# Altium PCB PCB文档.PcbDoc
Units mil, origin at the board's own origin, x right, y up, seen from the top; angles counter-clockwise.
Board outline 3937.01 x 3937.01 mil, 2 copper layers (Top Layer, Bottom Layer); 16 components, 25 nets, 105 pads, 0 vias.
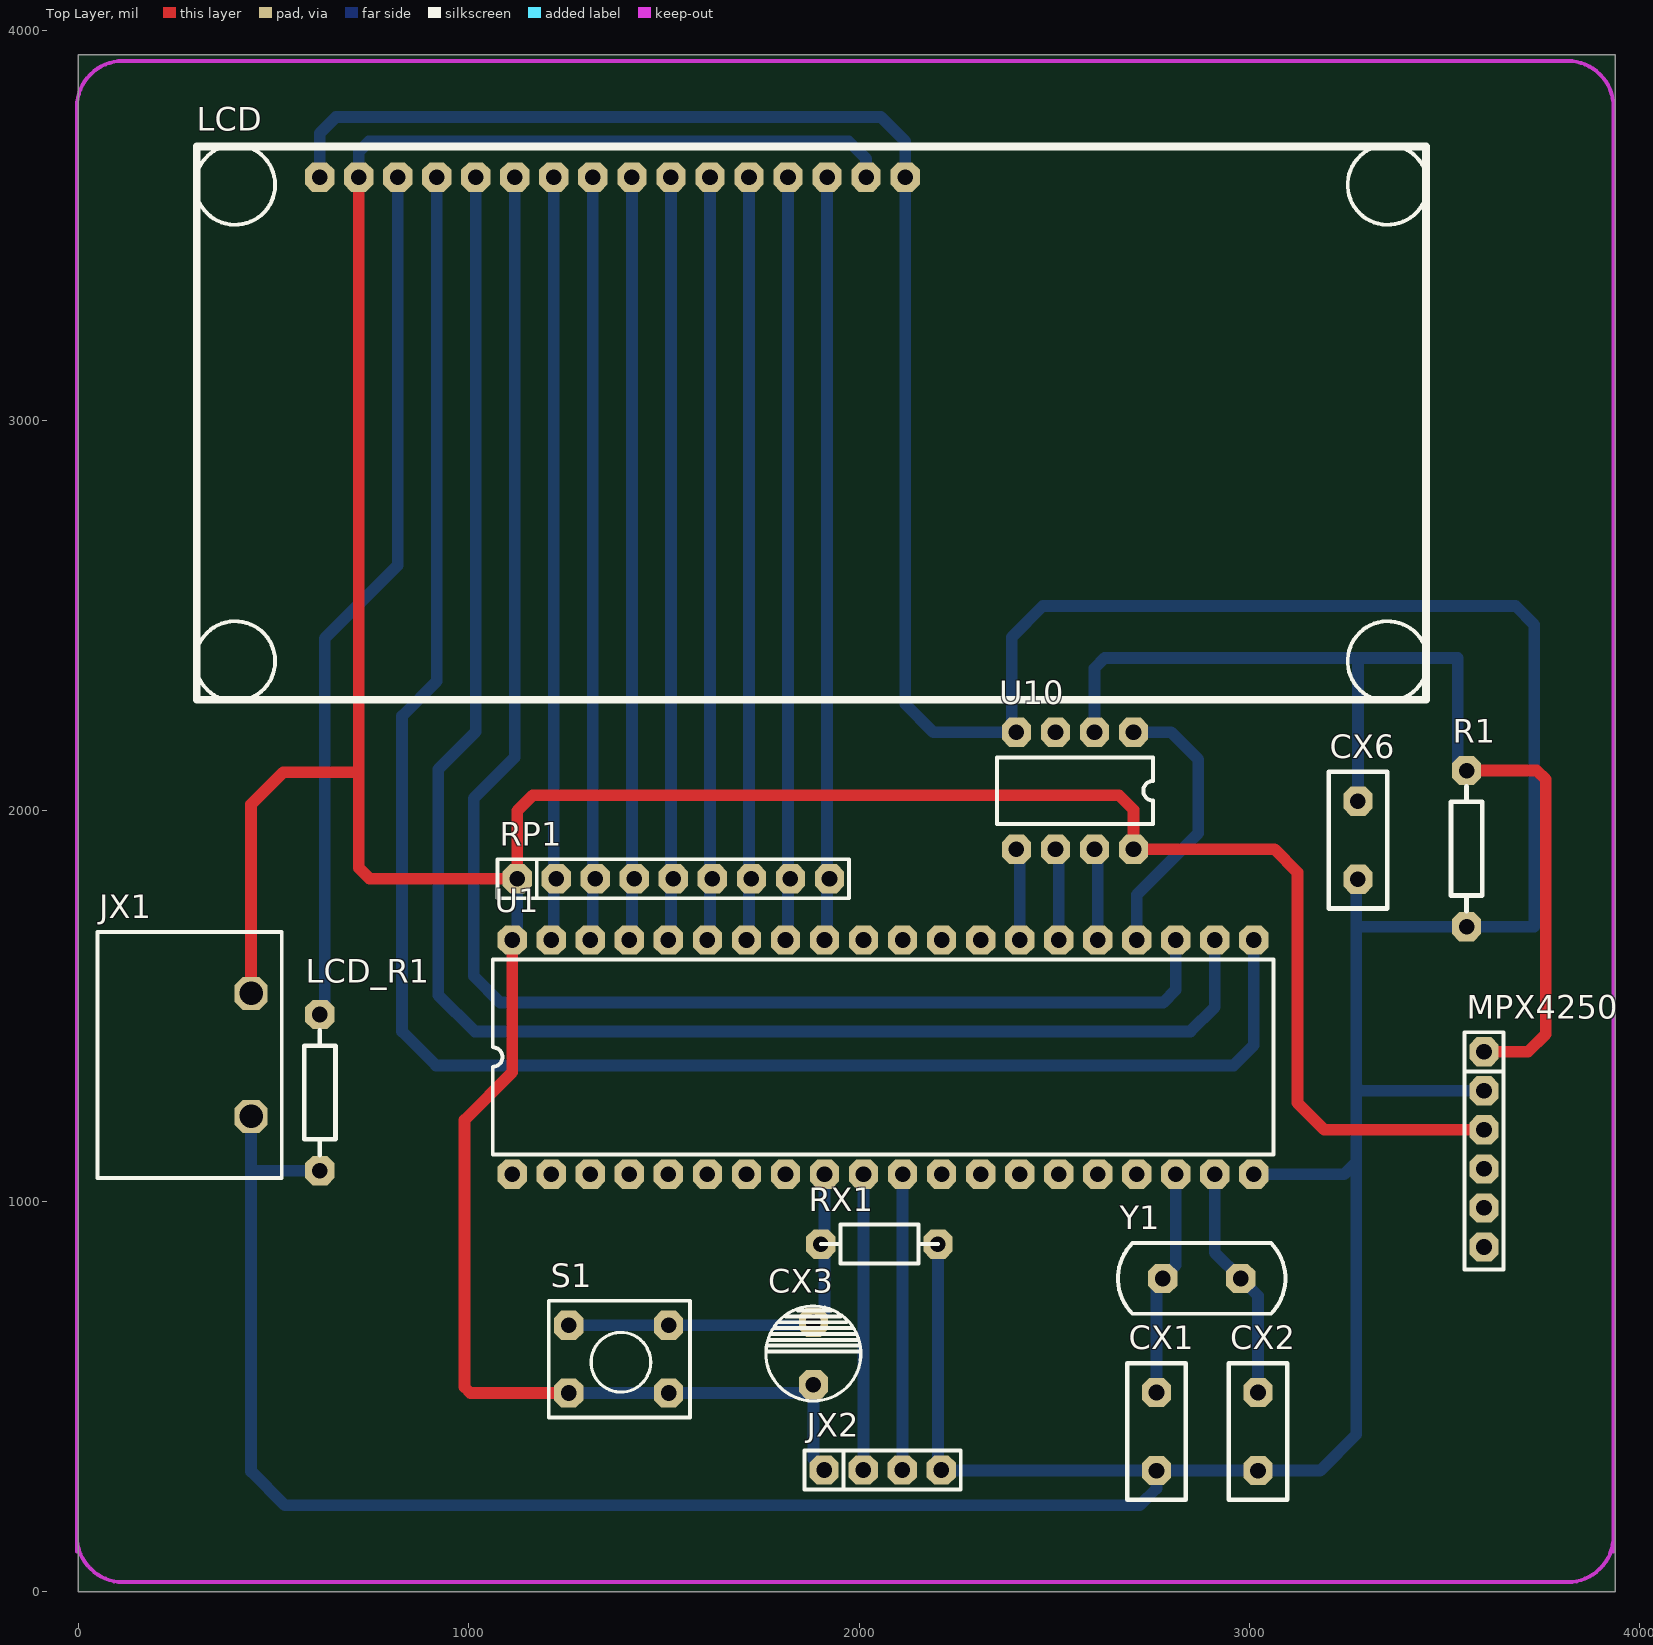
[diagram p0: Top Layer view]
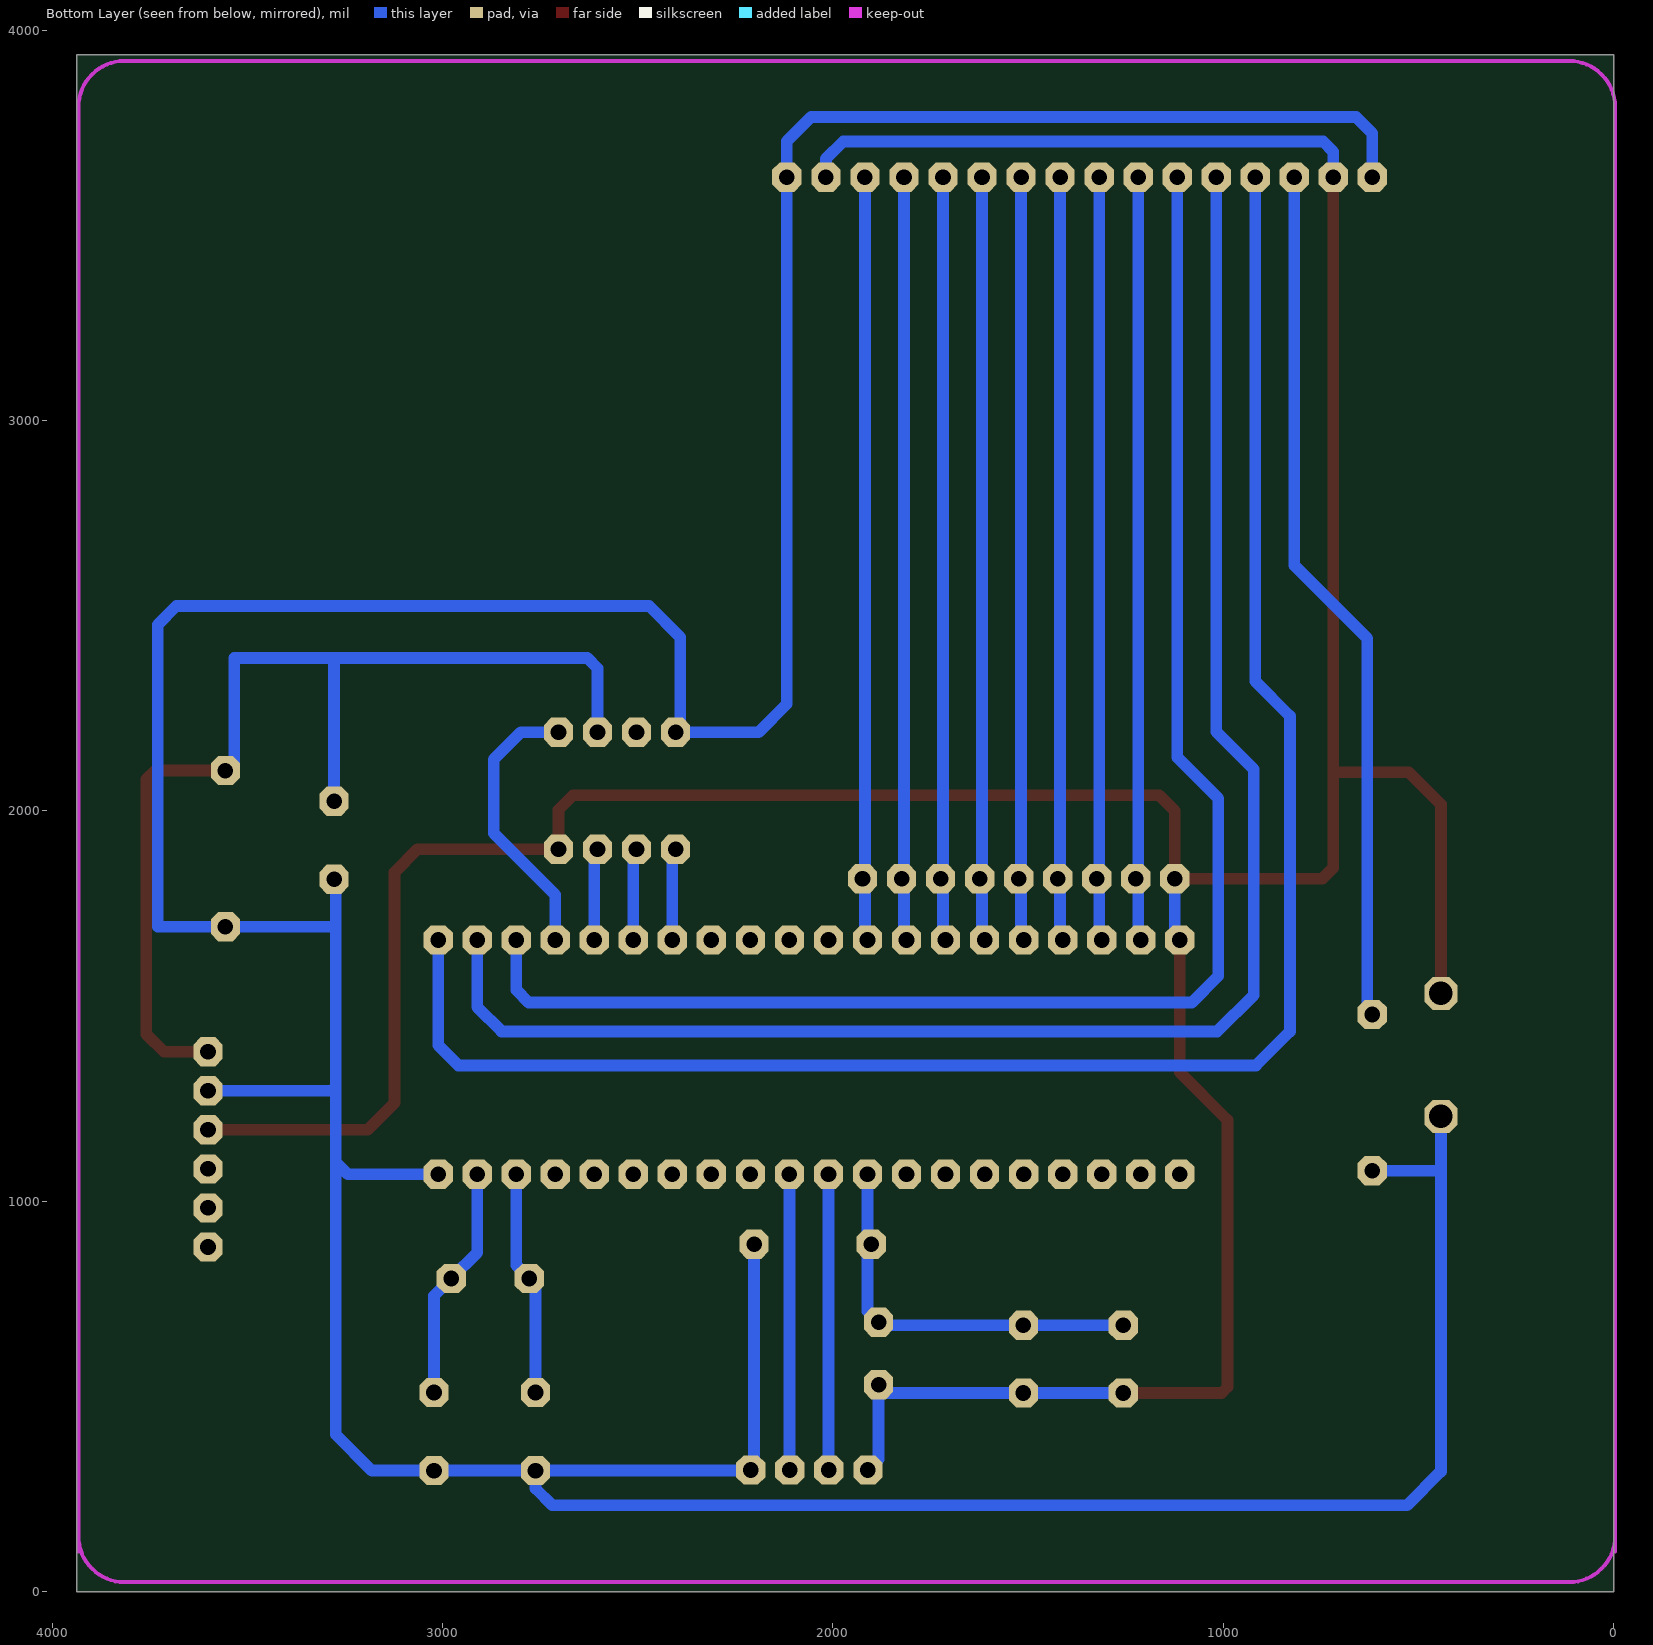
[diagram p1: Bottom Layer view, seen from below]

## Layer stack, top to bottom
Top Solder: solder mask 0.4, Solder Resist, Dk 3.5
Top Layer: signal copper 1.4
Dielectric1: dielectric 12.6, FR-4, Dk 4.8
Bottom Layer: signal copper 1.4
Bottom Solder: solder mask 0.4, Solder Resist, Dk 3.5

## Board outline
0,0 3937.01,0 3937.01,3937.01 0,3937.01

## Design rules (kind name [scope] priority, off if disabled: settings)
Clearance [All] p1: gap=10 ignorepadtopadclearanceinfootprint=FALSE except(0: Arc-Hole Track-Hole SMDPad-Hole THPad-Hole Via-Hole Fill-Hole Poly-Hole Region-Hole Text-Hole)
ComponentClearance [All] p1 off: gap=10 collisioncheckmode=3 verticalgap=10 showdistances=FALSE
FabricationTestPointUsage TestPointUsage [All] p1: valid=0 allowmultiple=FALSE
FabricationTestpoint Testpoint [All] p1: side=3 testpointundercomponent=TRUE minsize=40 maxsize=100 preferedsize=60 minholesize=0 maxholesize=40 preferedholesize=32 testpointgrid=1 allowsidetop=TRUE allowsidebottom=TRUE usegrid=TRUE gridtolerance=0.01
Height [All] p1 off: minheight=0 maxheight=1000 prefheight=500
MinimumSolderMaskSliver [All] p1 off: minsoldermaskwidth=10
PlaneConnect [All] p1: planeconnectstyle=Direct reliefexpansion=20 reliefentries=4 reliefconductorwidth=10 reliefairgap=10
PolygonConnect [All] p1: connectstyle=Direct reliefconductorwidth=10 reliefentries=4 polygonreliefangle="90 Angle" airgapwidth=10
RoutingVias [All] p1: holewidth=11.81 width=27.56 viastyle="Through Hole" minholewidth=11.81 minwidth=27.56 maxholewidth=11.81 maxwidth=27.56
SilkToSilkClearance [All] p1 off: silktosilkclearance=10
SilkToSolderMaskClearance SilkscreenOverComponentPads [IsPad] p1 off: minsilkscreentomaskgap=10 clearancetoexposedcopper=TRUE
SolderMaskExpansion [All] p1: expansion=4 istentingtop=FALSE
Width [All] p1: maxlimit=60 minlimit=30 preferedwidth=30
22 further rules are at their usual default settings.

## Components (designator, comment, footprint, x,y, rotation, side; value= is the part's Value field where it differs from the comment)
CX1 "22PF" 电容22 2742,390 r90 top
CX2 "22PF" 电容22 3002,390 r90 top
CX3 "10UF" 电容10 1882,690 r270 top
CX6 "22PF" 电容22 3258,1905 r90 top
JX1 "电源" 端子 280,1360 r90 top
JX2 "程序下载口" ASIP4 1922,310 r0 top
LCD "LCD1602" ALCD1602 618,3545 r0 top
LCD_R1 "3.3K" 电阻 640,1080 r90 top
MPX4250 "SIP6" ASIP6 3598,1025 r270 top
R1 "61K" 电阻 3578,1705 r90 top
RP1 "排阻" ASIP9 1132,1823 r0 top
RX1 "1K" 电阻0.3 2002,890 r180 top
S1 "按键" 按键 1382,590 r0 top
U1 "STC89C52" ADIP40 1162,1110 r90 top
U10 "ADC0832" ADIP8 2720,2220 r270 top
Y1 "晶振" 晶振 2962,810 r180 top

## Footprints (in the part's own frame and the unit in brackets; to place one, negate y for a bottom-side part, rotate by r counter-clockwise, add the part's x,y. Pads: shape width x height; smd on the part's side, far side on the other; paste and mask are expansions set on the pad)
ADIP8 [mil]
  oct 75x75 hole 40: 1(18.43,-16.85) 2(18.43,-116.85) 3(18.43,-216.85) 4(18.43,-316.85) 5(318.43,-316.85) 6(318.43,-216.85) 7(318.43,-116.85) 8(318.43,-16.85)
  silkscreen extent 83,-367 253,33
ADIP40 [mil]
  oct 75x75 hole 40: 1(-40.55,50.55) 2(-40.55,-49.45) 3(-40.55,-149.45) 4(-40.55,-249.45) 5(-40.55,-349.45) 6(-40.55,-449.45) 7(-40.55,-549.45) 8(-40.55,-649.45) 9(-40.55,-749.45) 10(-40.55,-849.45) 11(-40.55,-949.45) 12(-40.55,-1049.45) 13(-40.55,-1149.45) 14(-40.55,-1249.45) 15(-40.55,-1349.45) 16(-40.55,-1449.45) 17(-40.55,-1549.45) 18(-40.55,-1649.45) 19(-40.55,-1749.45) 20(-40.55,-1849.45) 21(559.45,-1849.45) 22(559.45,-1749.45) 23(559.45,-1649.45) 24(559.45,-1549.45) 25(559.45,-1449.45) 26(559.45,-1349.45) 27(559.45,-1249.45) 28(559.45,-1149.45) 29(559.45,-1049.45) 30(559.45,-949.45) 31(559.45,-849.45) 32(559.45,-749.45) 33(559.45,-649.45) 34(559.45,-549.45) 35(559.45,-449.45) 36(559.45,-349.45) 37(559.45,-249.45) 38(559.45,-149.45) 39(559.45,-49.45) 40(559.45,50.55)
  silkscreen extent 9,-1899 509,101
ALCD1602 [mil]
  oct 75x75 hole 40: 1(0,78.74) 2(100,78.74) 3(200,78.74) 4(300,78.74) 5(400,78.74) 6(500,78.74) 7(600,78.74) 8(700,78.74) 9(800,78.74) 10(900,78.74) 11(1000,78.74) 12(1100,78.74) 13(1200,78.74) 14(1300,78.74) 15(1400,78.74) 16(1500,78.74)
  silkscreen extent -319,-1264 2839,161
ASIP4 [mil]
  oct 75x75 hole 40: 1(-11.57,1.57) 2(88.43,1.57) 3(188.43,1.57) 4(288.43,1.57)
  silkscreen extent -62,-48 338,52
ASIP6 [mm]
  oct 1.905x1.905 hole 1.016: 1(-9.09,0.08) 2(-6.55,0.08) 3(-4.01,0.08) 4(-1.47,0.08) 5(1.07,0.08) 6(3.61,0.08)
  silkscreen extent -10.36,-1.19 5.08,1.35
ASIP9 [mm]
  oct 1.905x1.905 hole 1.016: 1(-0.2,0.08) 2(2.34,0.08) 3(4.88,0.08) 4(7.42,0.08) 5(9.96,0.08) 6(12.5,0.08) 7(15.04,0.08) 8(17.58,0.08) 9(20.12,0.08)
  silkscreen extent -1.47,-1.19 21.39,1.35
按键 [mil]
  oct 75x75 hole 40: 1(-126,92) 1(129.9,92) 2(-126,-81.23) 2(129.9,-81.23)
  silkscreen extent -177,-144 185,155
晶振 [mil]
  oct 75x75 hole 40: 1(-15.69,7.8) 2(184.31,7.8)
  silkscreen extent -130,-83 299,98
电容10 [mil]
  oct 75x75 hole 40: 1(160,1) 2(0,1)
  silkscreen extent -42,-121 202,123
电容22 [mil]
  oct 75x75 hole 40: 1(-80,-20) 2(120,-20)
  silkscreen extent -155,-95 195,55
电阻 [mil]
  oct 75x75 hole 40: 1(-1.57,21.57) 2(398.43,21.57)
  silkscreen extent 38,-18 358,62
电阻0.3 [mil]
  oct 75x75 hole 40: 1(-200,0) 2(100,0)
  silkscreen extent -200,-50 100,50
端子 [mil]
  oct 85x85 hole 60: 1(-142.52,-162.2) 2(172.44,-162.2)
  silkscreen extent -300,-241 330,231

## Part data
CX1 CX2 CX6: library part 电容22PF
CX3: library part 电容10UF
JX1: library part 端子
LCD_R1 R1 RX1: library part 电阻1K
U1: library part 单片机

## Nets (pads, with @x,y where several pads share a name; then routed paths per layer and width w, separated by ;. In a path a pad name is that pad's centre, name@x,y a point inside that pad or via, vN(x,y) a via of type N, cw(c..) or ccw(c..) an arc to the next point about the centre after c; other vN are vias at no path point)
CS: U1.24 U10.1 | length 722.5
  Bottom Layer w30: U10.1 2799.43,2201.57 2869,2132 2869,1943.1 2711.45,1785.55 U1.24
DB0: LCD.7 RP1.2 U1.39 | length 1947.7
  Bottom Layer w30: U1.39@1218,1676 LCD.7
DB1: LCD.8 RP1.3 U1.38 | length 1947.7
  Bottom Layer w30: U1.38@1318,1676 LCD.8
DB2: LCD.9 RP1.4 U1.37 | length 1947.7
  Bottom Layer w30: U1.37@1418,1676 LCD.9
DB3: LCD.10 RP1.5 U1.36 | length 1947.7
  Bottom Layer w30: U1.36@1518,1676 LCD.10
DB4: LCD.11 RP1.6 U1.35 | length 1947.7
  Bottom Layer w30: U1.35@1618,1676 LCD.11
DB5: LCD.12 RP1.7 U1.34 | length 1947.7
  Bottom Layer w30: U1.34@1718,1676 LCD.12
DB6: LCD.13 RP1.8 U1.33 | length 1947.7
  Bottom Layer w30: U1.33@1818,1676 LCD.13
DB7: LCD.14 RP1.9 U1.32 | length 1947.7
  Bottom Layer w30: U1.32@1918,1676 LCD.14
DI: U1.26 U10.6 | length 223.8
  Bottom Layer w30: U1.26 U10.6@2511.45,1893.28
DO: U1.27 U10.5 | length 223.8
  Bottom Layer w30: U1.27 U10.5@2411.45,1893.28
E: LCD.6 U1.23 | length 4058.3
  Bottom Layer w30: LCD.6 1118,2137 1013,2032 1013,1577 1081,1509 2779,1509 2811.45,1541.45 U1.23
FMQ: U1.16
GND: CX1.1 CX2.1 CX6.1 JX1.1 JX2.4 LCD.1 LCD.16 LCD_R1.1 MPX4250.2 R1.1 RX1.1 U1.20 U10.4 | length 13480.8
  Bottom Layer w30: JX1.1 442.2,307.8 529,221 2719,221 2762,264 CX1.1 ; 452.63,1078.43 LCD_R1.1 ; LCD.1 618,3736 660,3778 2055.48,3778 2118,3715.48 LCD.16 2118,2274 2190.43,2201.57 U10.4 2391,2213.72 2391,2445 2471,2525 3682,2525 3730,2477 3730,1704 3729.43,1703.43 R1.1 3273.43,1703.43 ; JX2.4@2202,320 RX1.1 ; JX2.4 2212,310 CX1.1 ; U1.20 3242.55,1069.45 3273.43,1100.32 ; CX6.1 3273.43,1820.43 3273.43,1703.43 ; MPX4250.2 3284.13,1282.87 3273.43,1293.57 ; CX1.1 CX2.1 3181,310 3273.43,402.43 3273.43,1100.32 ; 3273.43,1100.32 3273.43,1293.57 ; 3273.43,1293.57 3273.43,1703.43
NetCX1_2: CX1.2 U1.18 Y1.2 | length 579.9
  Bottom Layer w30: CX1.2 2762,786.52 Y1.2 2811.45,835.97 U1.18
NetCX2_2: CX2.2 U1.19 Y1.1 | length 605.2
  Bottom Layer w30: U1.19 2911.45,868.44 Y1.1 3022,757.89 CX2.2
NetCX6_2: CX6.2 MPX4250.1 R1.2 U10.2 | length 2799.1
  Top Layer w30: R1.2 3736.43,2103.43 3759,2080.85 3759,1428 3713.87,1382.87 MPX4250.1
  Bottom Layer w30: U10.2 2603.15,2365.85 2629.3,2392 3534,2392 3534,2125.85 R1.2 ; CX6.2 3278,2379
NetLCD_3: LCD.3 LCD_R1.2 | length 2228
  Bottom Layer w30: LCD_R1.2 631,1491 631,2442 818,2629 LCD.3
RS: LCD.4 U1.21 | length 4735.4
  Bottom Layer w30: LCD.4 918,2332 829,2243 829,1435 916,1348 2960,1348 3011.45,1399.45 U1.21
RST: CX3.2 RX1.2 S1.1 U1.9 | length 981.3
  Bottom Layer w30: S1.1@1256,682 1511.9,682 1875,682 CX3.2 ; 1911.45,718.45 U1.9
RW: LCD.5 U1.22 | length 4361.3
  Bottom Layer w30: LCD.5 1018,2203 922,2107 922,1528 1015,1435 2849,1435 2911.45,1497.45 U1.22
RXD: JX2.3 U1.11 | length 756.9
  Bottom Layer w30: JX2.3@2111.45,312.6 U1.11
SCLK: U1.25 U10.7 | length 223.8
  Bottom Layer w30: U1.25 U10.7@2611.45,1893.28
TXD: JX2.2 U1.10 | length 756.9
  Bottom Layer w30: JX2.2@2011.45,312.6 U1.10
VCC: CX3.1 JX1.2 JX2.1 LCD.2 LCD.15 MPX4250.3 RP1.1 S1.2 U1.40 U10.8 | length 10348
  Top Layer w30: JX1.2 442.2,2016.8 524.41,2099 718,2099 ; LCD.2 718,2099 ; U1.40 1111.45,1330.45 989,1208 989,524 1004.23,508.77 S1.2@1256,508.77 ; MPX4250.3 3192.13,1182.87 3123,1252 3123,1843.15 3064.57,1901.57 U10.8 2703.15,2002.85 2666,2040 1164,2040 1124.13,2000.13 RP1.1 745.85,1826.15 718,1854 718,2099
  Bottom Layer w30: LCD.2 718,3689 744,3715 1973.48,3715 2018,3670.48 LCD.15 ; U1.40 1124.13,1682.13 RP1.1 ; S1.2@1256,508.77 1511.9,508.77 1861.77,508.77 CX3.1 1883,339 JX2.1
pads on no net: MPX4250.4 MPX4250.5 MPX4250.6 U1.1 U1.2 U1.3 U1.4 U1.5 U1.6 U1.7 U1.8 U1.12 U1.13 U1.14 U1.15 U1.17 U1.28 U1.29 U1.30 U1.31 U10.3

## Keep-outs
Keep-Out Layer:
  lines w10: -4,102.74 -4,3803.53 cw(c114.11,3803.53) 114.11,3921.64 3814.9,3921.64 cw(c3814.9,3803.53) 3933.01,3803.53 3933.01,102.74 ; -4,142.11 ccw(c114.11,142.11) 114.11,24 3814.9,24 ccw(c3814.9,142.11) 3933.01,142.11